# Altium PCB PCB1.PcbDoc
Units mm, origin at the board's own origin, x right, y up, seen from the top; angles counter-clockwise.
Board outline 133.2 x 122.7 mm, 2 copper layers (Top Layer, Bottom Layer); 87 components, 41 nets, 227 pads, 11 vias.
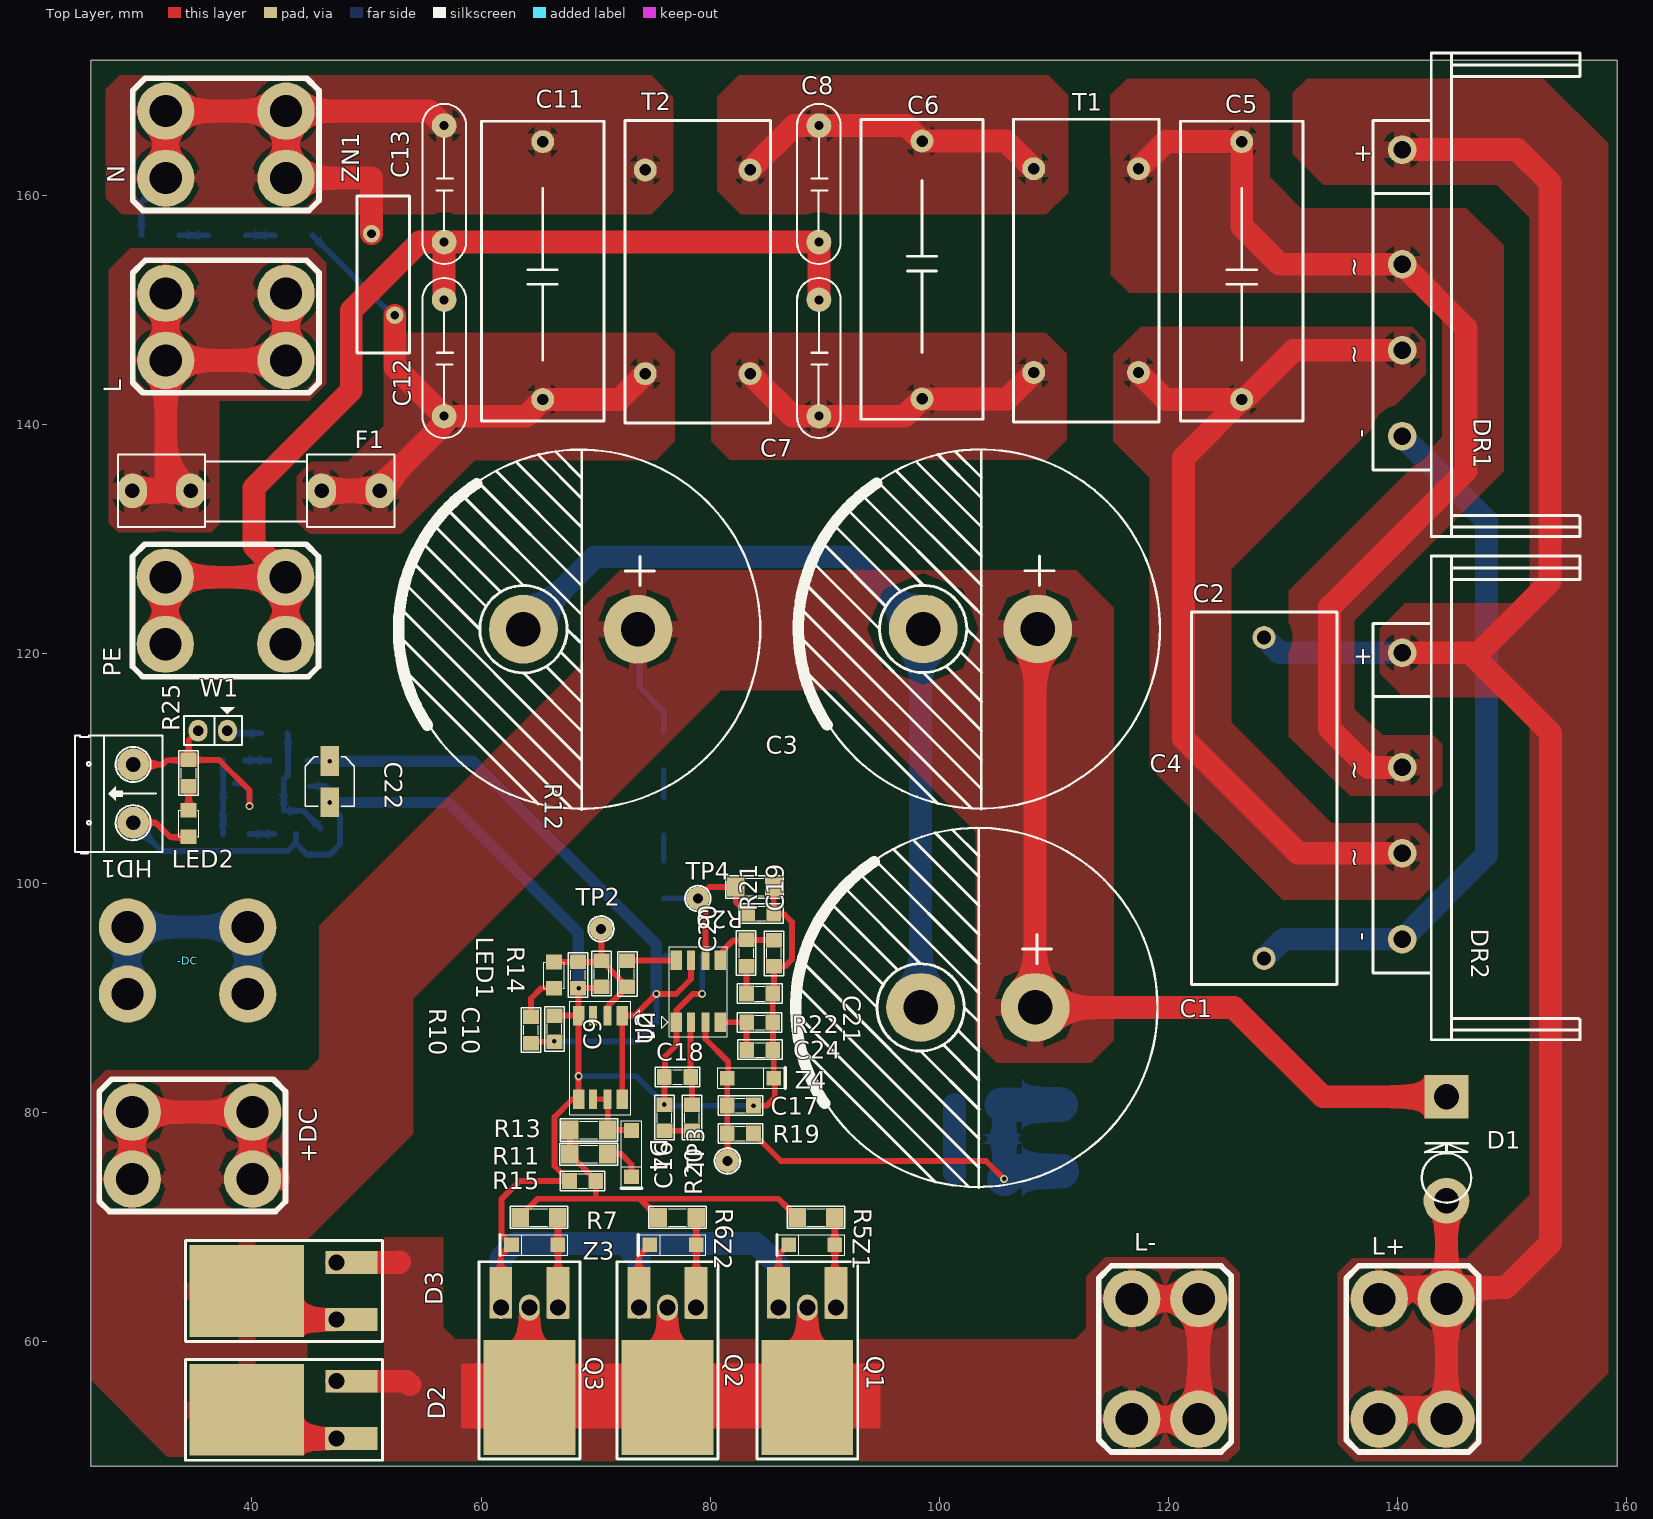
[diagram p0: Top Layer view]
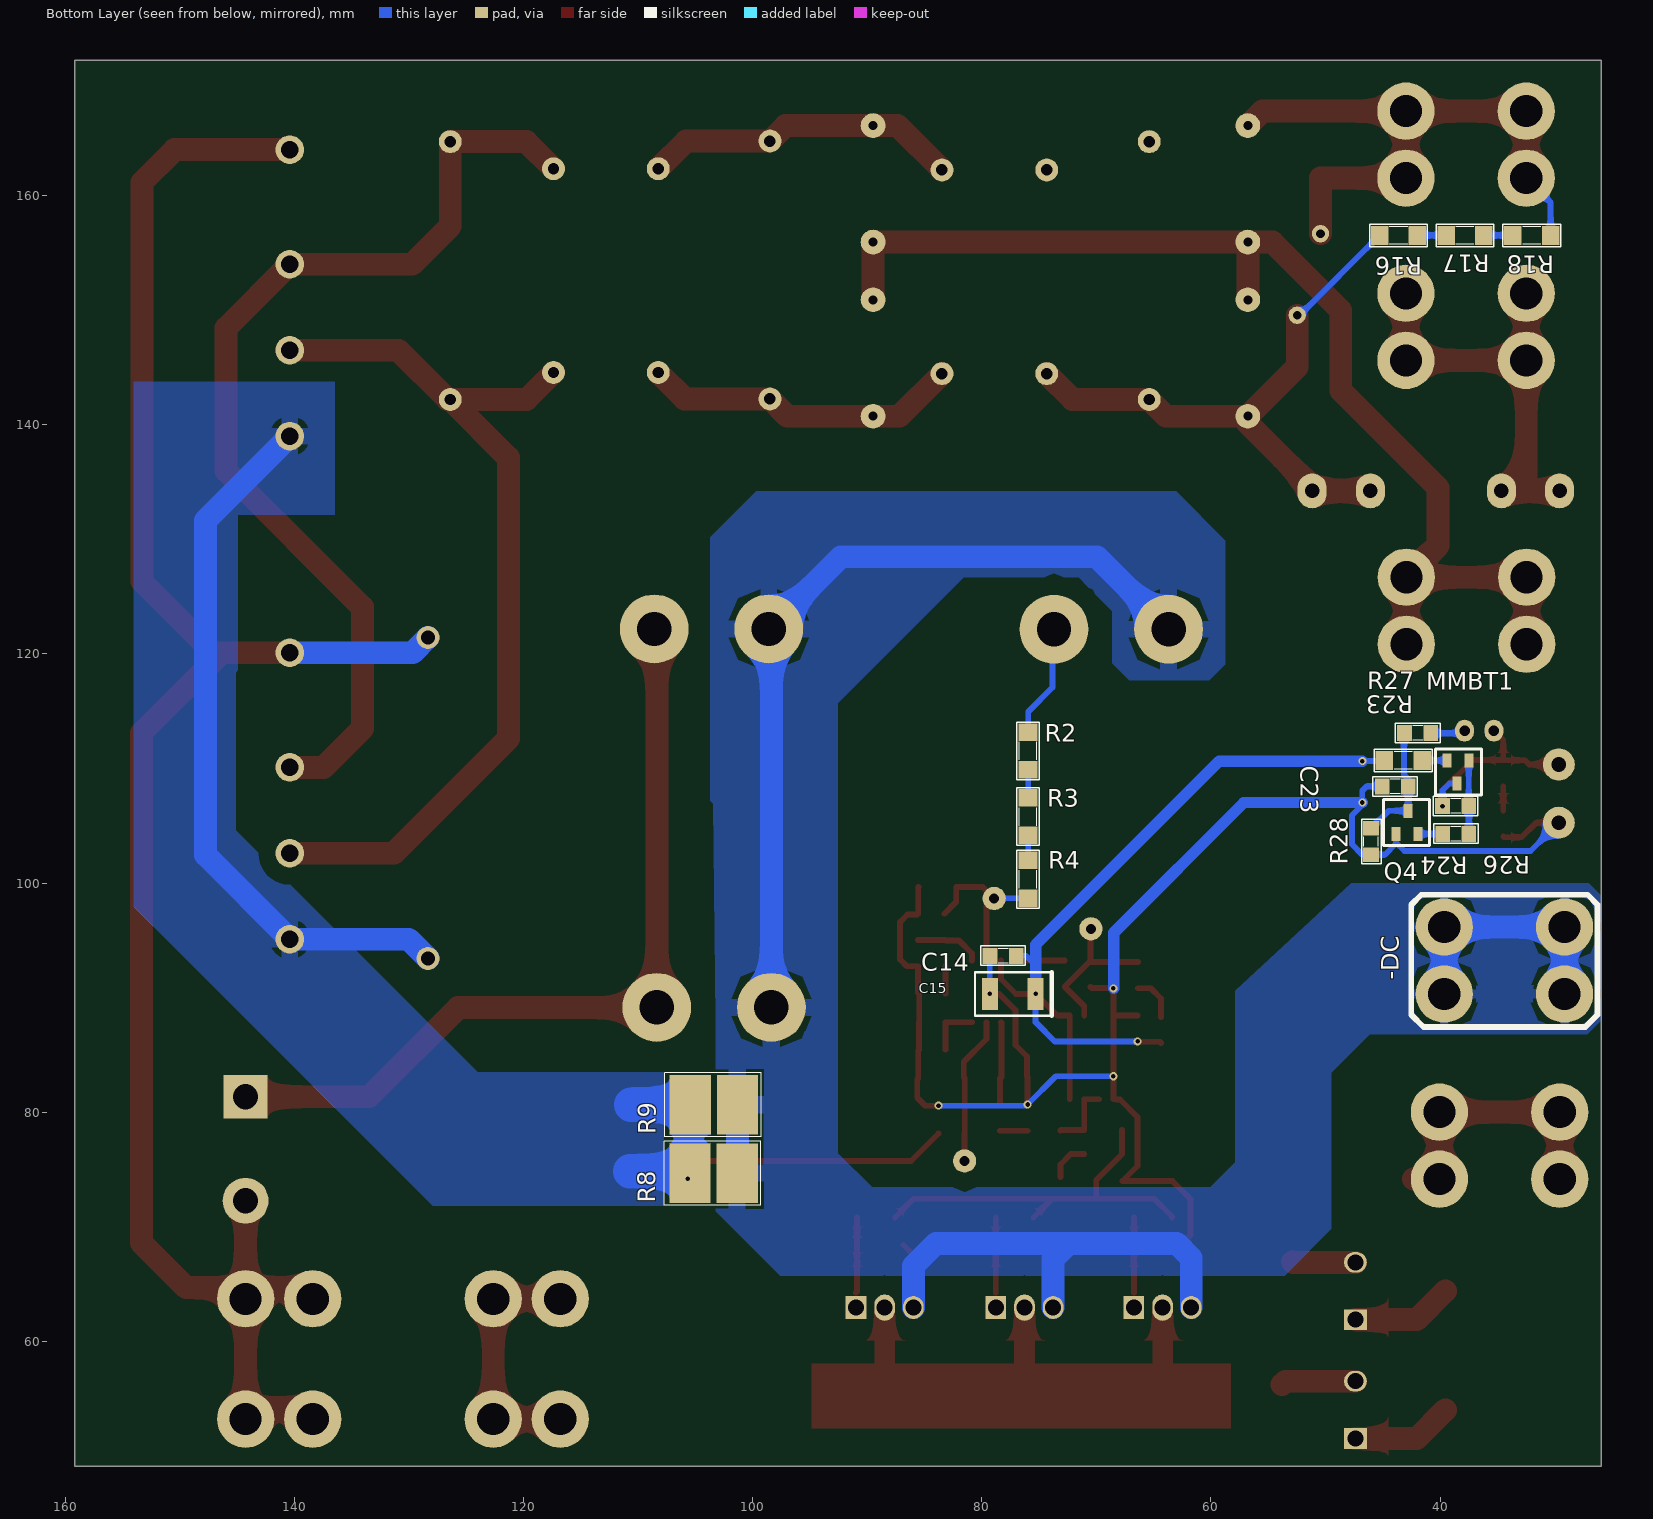
[diagram p1: Bottom Layer view, seen from below]
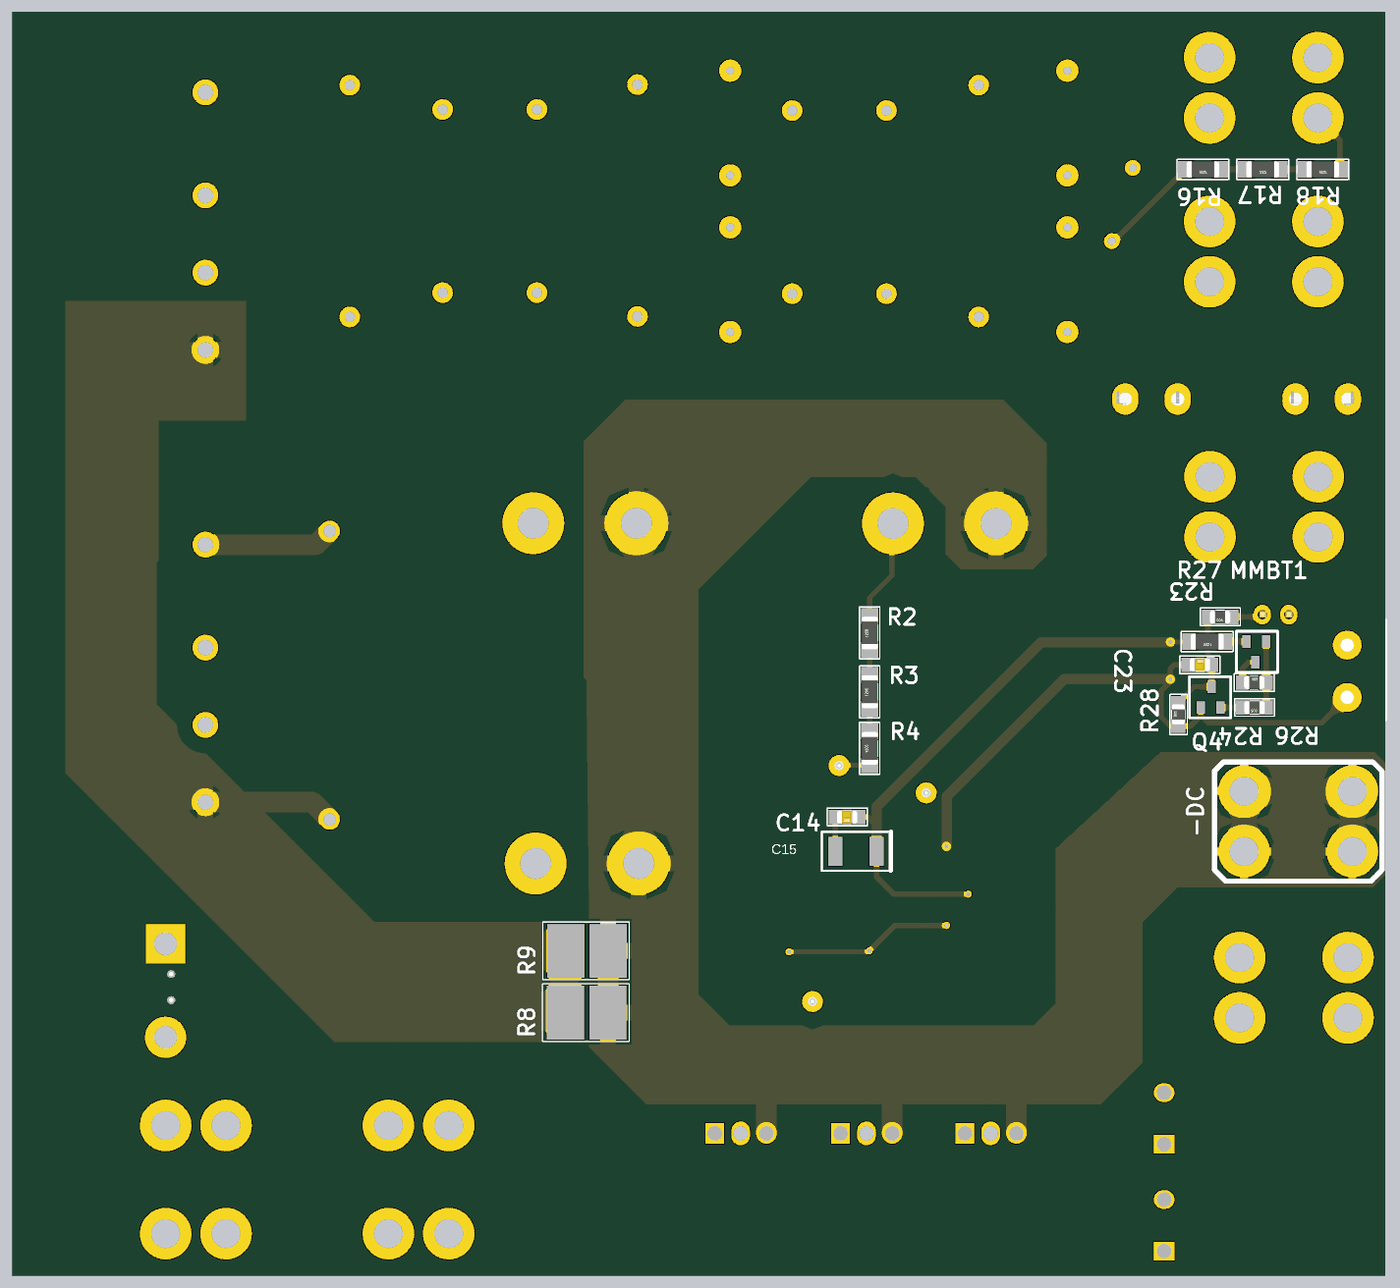
[diagram p2: 3D render of the assembled board from below, using the file's embedded part models]

## Layer stack, top to bottom
Top Solder: solder mask 0.0102, Solder Resist, Dk 3.5
Top Layer: signal copper 0.0356
Dielectric 1: dielectric 0.32, FR-4, Dk 4.8
Bottom Layer: signal copper 0.0356
Bottom Solder: solder mask 0.0102, Solder Resist, Dk 3.5

## Board outline
25.935,49.125 159.135,49.125 159.135,171.82 25.935,171.82

## Design rules (kind name [scope] priority, off if disabled: settings)
Clearance [All] p1: gap=0.2 except(0.5: Fill-Poly; 1.5: THPad-Poly)
PlaneClearance PlaneClearance_1 [All] p1: clearance=0.508
PlaneClearance "PlaneClearance Power" [(InNet('Net+DC_0') AND IsPolygon)] p2: clearance=3
PlaneConnect [All] p1: planeconnectstyle=Relief reliefexpansion=2 reliefentries=4 reliefconductorwidth=1.5 reliefairgap=1
PolygonConnect [All] p1: connectstyle=Relief reliefconductorwidth=1.5 reliefentries=4 polygonreliefangle="90 Angle" airgapwidth=0.5
RoutingVias [All] p1: holewidth=0.711 width=1.27 viastyle="Through Hole" minholewidth=0.711 minwidth=1.27 maxholewidth=0.711 maxwidth=1.27
SolderMaskExpansion [All] p1: expansion=0.1
Width [All] p1: maxlimit=5 minlimit=0.508 preferedwidth=0.508
28 further rules are at their usual default settings.

## Classes and differential pairs
component class Sheet3: C14 C15 C16 C17 C18 C19 C20 C21 C22 C23 C24 C27 C28 C29 C30 C32 C33 C34 C35 HD1 LED2 MMBT1 Q4 R19 R20 R21 R22 R23 R24 R25 R26 R27 R28 R29 TP3 TP4 TP? U2 U3 W1 Z4
component class Sheet1: +DC -DC C1 C2 C4 C5 C6 C7 C8 C9 C10 C11 C12 C13 D1 D2 D3 D4 DR1 DR2 F1 L L+ L- LED1 N PE Q1 Q2 Q3 R2 R3 R4 R5 R6 R7 R8 R9 R10 R11 R12 R13 R14 R15 R16 R17 R18 T1 T2 TP2 U1 Z1 Z2 Z3 ZN1

## Components (designator, comment, footprint, x,y, rotation, side; value= is the part's Value field where it differs from the comment)
+DC "ERNI" Connector#1 35,77.02 r90 top
-DC "ERNI" Connector#2 34.575,93.3 r270 top
C1 "330uF/450V" CAPACITOR 98.36,89.145 r0 top
C2 "PP105/630V" "C1UF 28MM" 128.335,93.42 r90 top
C3 "330uF/450V" CAPACITOR 63.7,122.15 r0 top
C4 "330uF/450V" CAPACITOR 98.585,122.17 r0 top
C5 "1uF 275Vac" "CAP 11X22" 126.385,164.695 r270 top
C6 "1uF275Vac" "CAP 11X22" 98.485,142.245 r90 top
C7 "1.5nF 250Vac" CN4 89.485,150.895 r270 top
C8 "1.5nF 250Vac" CN4 89.485,166.095 r270 top
C9 "1nF" SM-CAP-0805 70.505,93.22 r270 top
C10 "10uF" SM-CAP-0805 66.405,86.145 r90 top
C11 "1uF275Vac" "CAP 11X22" 65.385,164.695 r270 top
C12 "1.5nF 250Vac" CN4 56.785,150.895 r270 top
C13 "1.5nF 250Vac" CN4 56.785,166.095 r270 top
C14 "0.1uF" SM-CAP-0805 77,93.65 r0 bottom
C15 "1uF" "CAP 3228" 75.3,90.325 r0 bottom
C16 "470pF" SM-CAP-0805 76.005,80.67 r270 top
C17 "470pF" SM-CAP-0805 83.78,80.57 r180 top
C18 "470pF" SM-CAP-0805 76.005,83.07 r0 top
C19 "470pF" SM-CAP-0805 85.555,92.738 r90 top
C20 "470pF" SM-CAP-0805 85.55,97.325 r180 top
C21 "470pF" SM-CAP-0805 85.455,90.338 r180 top
C22 "10uF50V" CAP-ALU-SMD-4.5x5x1.4 46.8,108.85 r270 top
C23 "0.47pF" SM-CAP-0805 45.07,108.438 r180 bottom
C24 "470pF" SM-CAP-0805 85.462,85.445 r180 top
D1 "Diode" D5AN 144.25,79.35 r270 top
D2 "CSD06060" "TO-263 DIODE" 47.4,54.025 r180 top
D3 "CSD06060" "TO-263 DIODE" 47.4,64.4 r180 top
D4 "1N5819HW" BZT52C15 73.131,74.345 r90 top
DR1 "D25XB60" D25XB60 140.385,169.895 r270 top
DR2 "D25XB60" D25XB60 140.385,125.995 r270 top
F1 "F20A" Fuse 40.375,134.225 r0 top
HD1 "12V Supply" HED2 29.645,105.263 r90 top
L "ERNI" Connector#1 37.922,148.47 r90 top
L+ "ERNI" Connector#1 141.375,58.65 r180 top
L- "ERNI" Connector#1 119.775,58.65 r180 top
LED1 "LED" SM-LED-0805-Blue 66.38,90.82 r90 top
LED2 "LED" SM-LED-0805-Green 34.495,106.338 r270 top
MMBT1 "PNP" SOT_23 39.395,110.688 r0 bottom
N "ERNI" Connector#1 37.922,164.37 r90 top
PE "ERNI" Connector#1 37.885,123.695 r90 top
Q1 "TPB60R125" "TO-263 MOSFET" 88.475,62.95 r270 top
Q2 "TPB60R125" "TO-263 MOSFET" 76.275,62.95 r270 top
Q3 "TPB60R125" "TO-263 MOSFET" 64.225,62.95 r270 top
Q4 "2N7002-7-F" SOT23 41.945,104.288 r180 bottom
R2 "400K (3216)" SM-RES-1206 75.95,109.874 r90 bottom
R3 "400K (3216)" SM-RES-1206 75.95,104.149 r90 bottom
R4 "400K (3216)" SM-RES-1206 75.95,98.674 r90 bottom
R5 "1F(3216)" SM-RES-1206 87.58,70.82 r0 top
R6 "1F(3216)" SM-RES-1206 75.48,70.82 r0 top
R7 "1F(3216)" SM-RES-1206 63.405,70.82 r0 top
R8 "0.01" WSHM2818 103.375,75.175 r0 bottom
R9 "0.05" WSHM2818 103.35,81.175 r0 bottom
R10 "3k" SM-RES-0805 64.355,88.32 r270 top
R11 "0" SM-RES-1206 71.056,76.345 r180 top
R12 "4k" SM-RES-0805 72.755,90.945 r90 top
R13 "1" SM-RES-1206 67.756,78.445 r0 top
R14 "10k" SM-RES-0805 68.48,93.12 r270 top
R15 "10k" SM-RES-0805 70.006,73.995 r180 top
R16 "300K(3216)" SM-RES-1206 41.985,156.52 r0 bottom
R17 "300K(3216)" SM-RES-1206 36.185,156.52 r0 bottom
R18 "300K(3216)" SM-RES-1206 30.36,156.52 r0 bottom
R19 "1k" SM-RES-0805 83.78,78.145 r180 top
R20 "1k" SM-RES-0805 78.405,80.67 r270 top
R21 "1k" SM-RES-0805 83.155,95.038 r270 top
R22 "1k" SM-RES-0805 83.187,87.845 r0 top
R23 "15.4" SM-RES-1206 41.57,110.688 r0 bottom
R24 "10k" SM-RES-0805 39.795,106.713 r180 bottom
R25 "3k" SM-RES-0805 34.495,110.738 r270 top
R26 "6.8k" SM-RES-0805 37.495,104.288 r0 bottom
R27 "10k" SM-RES-0805 40.825,113.075 r0 bottom
R28 "6.8k" SM-RES-0805 46.02,102.478 r90 bottom
R29 "10k" SM-RES-1206 82.225,99.65 r0 top
T1 "LF" "EMI TRANFORMER" 108.485,144.295 r90 top
T2 "LF" "EMI TRANFORMER" 74.585,144.195 r90 top
TP2 "TP" TP1 70.475,96 r180 top
TP3 "TP" TP1 81.505,75.745 r90 top
TP4 "TP" TP1 78.925,98.65 r90 top
U1 "TC4422" TC4422 72.322,88.431 r270 top
U2 "UCC28180" UCC28180 77.055,87.845 r90 top
W1 "Jumper" JP2 37.875,113.3 r180 top
Z1 "Zener" BZT52C15 86.83,68.42 r0 top
Z2 "BZT52C15" BZT52C15 74.73,68.42 r0 top
Z3 "BZT52C15" BZT52C15 62.655,68.42 r0 top
Z4 "BAT54" BZT52C15 85.555,82.97 r180 top
ZN1 "Z" "RT 7MM" 56.285,152.595 r90 top

## Footprints (in the part's own frame and the unit in brackets; to place one, negate y for a bottom-side part, rotate by r counter-clockwise, add the part's x,y. Pads: shape width x height; smd on the part's side, far side on the other; paste and mask are expansions set on the pad)
BZT52C15 [mm]
  rect 1.27x1.27 smd: 1(0.007,0) 2(4.057,0)
  silkscreen extent -1,-0.9 4.9,0.9
"C1UF 28MM" [mm]
  round 2 hole 1.2: 1(0,0) 2(28,0)
  silkscreen extent -2.29,-6.35 30.23,6.35
"CAP 11X22" [mm] "cap 11x22mm"
  round 2 hole 1: 1(0,0) 2(22.5,0)
  silkscreen extent -1.78,-5.33 24.38,5.33
"CAP 3228" [mm]
  rect 1.4x2.8 smd: 1(0,0) 2(4,0)
  silkscreen extent -1.4,-1.9 5.3,1.9
CAP-ALU-SMD-4.5x5x1.4 [mm]
  rect 2.6x1.6 smd: 1(-1.8,0) 2(1.8,0)
  silkscreen extent -2.15,-2.15 2.15,2.15, body extent -2.5,-2.15 2.5,2.15, height 5.45
CAPACITOR [mm]
  round 6 hole 3: 1(10,0) 2(0,0)
  silkscreen extent -10.9,-15.75 20.67,15.67
CN4 [mil] "Cap np W 0.4"
  round 85 hole 31: 1(0,0) 2(400,0)
  silkscreen extent -75,-75 475,75
Connector#1 [mm]
  round 5 hole 2.8: 0(-2.861,5.433) 0(-2.861,-5.067) 0(2.989,5.433) 0(2.989,-5.067)
  Multi-Layer pour cut-out: 5.708,-5.467 3.389,-5.467 3.389,-7.786 4.276,-7.61 5.029,-7.107 5.531,-6.355 5.708,-5.467
  Multi-Layer pour cut-out: 2.589,-7.801 2.589,-5.467 0.255,-5.467 0.433,-6.36 0.939,-7.117 1.696,-7.623 2.589,-7.801
  Multi-Layer pour cut-out: 0.24,-4.667 2.589,-4.667 2.589,-2.318 1.69,-2.497 0.928,-3.006 0.418,-3.768 0.24,-4.667
  Multi-Layer pour cut-out: 3.389,-2.325 3.389,-4.667 5.731,-4.667 5.553,-3.771 5.045,-3.011 4.285,-2.503 3.389,-2.325
  Multi-Layer pour cut-out: -0.142,-5.467 -2.461,-5.467 -2.461,-7.786 -1.574,-7.61 -0.821,-7.107 -0.319,-6.355 -0.142,-5.467
  Multi-Layer pour cut-out: -3.261,-7.801 -3.261,-5.467 -5.595,-5.467 -5.417,-6.36 -4.911,-7.117 -4.154,-7.623 -3.261,-7.801
  Multi-Layer pour cut-out: -5.61,-4.667 -3.261,-4.667 -3.261,-2.318 -4.16,-2.497 -4.922,-3.006 -5.432,-3.768 -5.61,-4.667
  Multi-Layer pour cut-out: -2.461,-2.325 -2.461,-4.667 -0.119,-4.667 -0.297,-3.771 -0.805,-3.011 -1.565,-2.503 -2.461,-2.325
  Multi-Layer pour cut-out: 5.708,5.033 3.389,5.033 3.389,2.714 4.276,2.89 5.029,3.393 5.531,4.145 5.708,5.033
  Multi-Layer pour cut-out: 2.589,2.699 2.589,5.033 0.255,5.033 0.433,4.14 0.939,3.383 1.696,2.877 2.589,2.699
  Multi-Layer pour cut-out: 0.24,5.833 2.589,5.833 2.589,8.182 1.69,8.003 0.928,7.494 0.418,6.732 0.24,5.833
  Multi-Layer pour cut-out: 3.389,8.175 3.389,5.833 5.731,5.833 5.553,6.729 5.045,7.489 4.285,7.997 3.389,8.175
  Multi-Layer pour cut-out: -2.461,8.175 -2.461,5.833 -0.119,5.833 -0.297,6.729 -0.805,7.489 -1.565,7.997 -2.461,8.175
  Multi-Layer pour cut-out: -5.61,5.833 -3.261,5.833 -3.261,8.182 -4.16,8.003 -4.922,7.494 -5.432,6.732 -5.61,5.833
  Multi-Layer pour cut-out: -3.261,2.699 -3.261,5.033 -5.595,5.033 -5.417,4.14 -4.911,3.383 -4.154,2.877 -3.261,2.699
  Multi-Layer pour cut-out: -0.142,5.033 -2.461,5.033 -2.461,2.714 -1.574,2.89 -0.821,3.393 -0.319,4.145 -0.142,5.033
  silkscreen extent -5.69,-7.94 5.86,8.31
Connector#2 [mm]
  round 5 hole 2.8: 0(-2.861,5.067) 0(-2.861,-5.433) 0(2.989,5.067) 0(2.989,-5.433)
  Multi-Layer pour cut-out: 5.708,5.467 3.389,5.467 3.389,7.786 4.276,7.61 5.029,7.107 5.531,6.355 5.708,5.467
  Multi-Layer pour cut-out: 2.589,7.801 2.589,5.467 0.255,5.467 0.433,6.36 0.939,7.117 1.696,7.623 2.589,7.801
  Multi-Layer pour cut-out: 0.24,4.667 2.589,4.667 2.589,2.318 1.69,2.497 0.928,3.006 0.418,3.768 0.24,4.667
  Multi-Layer pour cut-out: 3.389,2.325 3.389,4.667 5.731,4.667 5.553,3.771 5.045,3.011 4.285,2.503 3.389,2.325
  Multi-Layer pour cut-out: -0.142,5.467 -2.461,5.467 -2.461,7.786 -1.574,7.61 -0.821,7.107 -0.319,6.355 -0.142,5.467
  Multi-Layer pour cut-out: -3.261,7.801 -3.261,5.467 -5.595,5.467 -5.417,6.36 -4.911,7.117 -4.154,7.623 -3.261,7.801
  Multi-Layer pour cut-out: -5.61,4.667 -3.261,4.667 -3.261,2.318 -4.16,2.497 -4.922,3.006 -5.432,3.768 -5.61,4.667
  Multi-Layer pour cut-out: -2.461,2.325 -2.461,4.667 -0.119,4.667 -0.297,3.771 -0.805,3.011 -1.565,2.503 -2.461,2.325
  Multi-Layer pour cut-out: 5.708,-5.033 3.389,-5.033 3.389,-2.714 4.276,-2.89 5.029,-3.393 5.531,-4.145 5.708,-5.033
  Multi-Layer pour cut-out: 2.589,-2.699 2.589,-5.033 0.255,-5.033 0.433,-4.14 0.939,-3.383 1.696,-2.877 2.589,-2.699
  Multi-Layer pour cut-out: 0.24,-5.833 2.589,-5.833 2.589,-8.182 1.69,-8.003 0.928,-7.494 0.418,-6.732 0.24,-5.833
  Multi-Layer pour cut-out: 3.389,-8.175 3.389,-5.833 5.731,-5.833 5.553,-6.729 5.045,-7.489 4.285,-7.997 3.389,-8.175
  Multi-Layer pour cut-out: -2.461,-8.175 -2.461,-5.833 -0.119,-5.833 -0.297,-6.729 -0.805,-7.489 -1.565,-7.997 -2.461,-8.175
  Multi-Layer pour cut-out: -5.61,-5.833 -3.261,-5.833 -3.261,-8.182 -4.16,-8.003 -4.922,-7.494 -5.432,-6.732 -5.61,-5.833
  Multi-Layer pour cut-out: -3.261,-2.699 -3.261,-5.033 -5.595,-5.033 -5.417,-4.14 -4.911,-3.383 -4.154,-2.877 -3.261,-2.699
  Multi-Layer pour cut-out: -0.142,-5.033 -2.461,-5.033 -2.461,-2.714 -1.574,-2.89 -0.821,-3.393 -0.319,-4.145 -0.142,-5.033
D5AN [mm] "Diode 5A, W 200mil, L 250mil"
  round 4 hole 2.2: 1(7.08,0)
  rect 3.81x3.81 hole 2.2: 2(-2,0)
  silkscreen extent 2.06,-2.16 7.24,2.16, body extent 0.53,-1.88 4.8,0.79, height 6.41
D25XB60 [mm]
  round 2.5 hole 1.5: 1(5.9,0) 2(15.9,0) 3(23.4,0) 4(30.9,0)
  silkscreen extent -2.54,-2.54 39.67,15.5
"EMI TRANFORMER" [mm]
  round 2 hole 1: 1(0.254,0.254) 2(0.254,-8.89) 3(18.034,0.254) 4(18.034,-8.89)
  silkscreen extent -4.06,-10.67 22.35,2.03
Fuse [mil] "De Fuse"
  oval 100x120 hole 50: 1(-425,0) 1(-225,0) 2(225,0) 2(425,0)
  silkscreen extent -475,-125 475,125, body extent -448,-117 459,127, height 378
HED2 [mil] "Header 2, 2 pin, hight 300mil, Pin to Pin 200, Colour Green"
  round 110 hole 50: 1(0,0) 2(200,0)
  silkscreen extent -106,-100 300,200, body extent -92,-140 302,155, height 394
JP2 [mil]
  oval 65x75 hole 36: 1(0,0) 2(101,0)
  silkscreen extent -50,-81 150,50, body extent -48,-50 148,48, height 323
"RT 7MM" [mil]
  round 60 hole 30: 1(-120,150) 2(160,230)
  silkscreen extent -250,100 290,280
SM-CAP-0805 [mil]
  rect 50x55 smd: 1(0,0) 2(90,0)
  silkscreen extent -32,-34 121,33, body extent 6,-25 84,25, height 31
SM-LED-0805-Blue [mil]
  rect 50x55 smd: 1(0,0) 2(90,0)
  silkscreen extent 0,-35 90,35, body extent 5,-25 85,25, height 43
SM-LED-0805-Green [mil]
  rect 50x55 smd: 1(0,0) 2(90,0)
  silkscreen extent 0,-35 90,35, body extent 5,-25 85,25, height 43
SM-RES-0805 [mil]
  rect 50x55 smd: 1(0,0) 2(90,0)
  silkscreen extent -32,-34 121,33, body extent 6,-25 84,25, height 31
SM-RES-1206 [mil]
  rect 60x65 smd: 1(0,0) 2(130,0)
  silkscreen extent -34,-38 164,39, body extent 2,-31 128,31, height 40
SOT23 [mm]
  rect 0.8x1.2 smd: 1(-1.9,0) 2(-0.85,2) 3(0,0)
  silkscreen extent -3,-1 1,3
SOT_23 [mm]
  rect 0.8x1.2 smd: 1(-1.9,0) 2(-0.85,2) 3(0,0)
  silkscreen extent -3,-1 1,3
TC4422 [mm]
  rect 1.7x1 smd: 1(0,0) 4(0,-3.81) 5(7.3,-3.81) 8(7.3,0)
  rect 1.7x0.7 smd: 2(0,-1.27) 3(0,-2.54) 6(7.3,-2.54) 7(7.3,-1.27)
  silkscreen extent -1.27,-4.57 8.64,1.52
"TO-263 DIODE" [mm]
  rect 4.5x2 smd: 1(-1.3,2.5) 2(-1.3,-2.5)
  rect 2x1.8 hole 1.4: 1(0,2.5)
  rect 10x8 smd: 1(7.85,0)
  oval 2x1.8 hole 1.4: 2(0,-2.5)
  silkscreen extent -4,-4.4 13.2,4.4
"TO-263 MOSFET" [mm]
  rect 4.5x2 smd: 1(-1.3,2.5) 3(-1.3,-2.5)
  rect 2x1.8 hole 1.4: 1(0,2.5)
  oval 2.3x1.8 hole 1.4: 2(0,0)
  rect 10x8 smd: 2(7.85,0)
  oval 2x1.8 hole 1.4: 3(0,-2.5)
  Top Layer lines w1.8: 7.2,0 0,0
  Top Layer lines w2: 7.3,-0.1 7.2,0
  silkscreen extent -4,-4.4 13.2,4.4
TP1 [mil] "Test point"
  round 80 hole 35: 1(0,0)
  silkscreen extent -44,-44 44,44, body extent -50,-50 50,50, height 178
UCC28180 [mm]
  rect 1.7x1 smd: 1(0,0) 4(0,-3.81) 5(5.4,-3.81) 8(5.4,0)
  rect 1.7x0.7 smd: 2(0,-1.27) 3(0,-2.54) 6(5.4,-2.54) 7(5.4,-1.27)
  silkscreen extent -1.27,-4.44 6.6,1.27
WSHM2818 [mm]
  rect 3.6x5.2 smd: 1(-2.027,0.508) 2(2.083,0.508)
  silkscreen extent -4.09,-2.29 4.32,3.3

## Part data
+DC -DC L L+ L- N PE: library part Connector
C1 C3 C4 C22: library part CP9, "Cap 10000uF/63V"
C2 C5 C6 C7 C8 C9 C10 C11 C12 C13 C14 C15 C16 C17 C18 C19 C20 C21 C23 C24: library part "Cap Semi_3", "Capacitor (Semiconductor SIM Model)"
D1: "Default Diode"
D4: library part D0.5A, "D0.5A"
DR1 DR2: library part "Bridge Rectifier"
F1: library part Fuse, "Fuse"
HD1: library part Hed2, "Header 2 (Green)"
LED1 LED2: "LED Single colour Green and Red"
MMBT1: "PNP Bipolar Transistor"
Q1 Q2 Q3 Q4: library part IRF840, "MOSFET N - CHANNEL 500V - 0.75 - 8A - TO-220"
R2 R3 R4 R5 R6 R7 R8 R9 R10 R11 R12 R13 R14 R15 R16 R17 R18 R19 R20 R21 R22 R23 R24 R25 R26 R27 R28 R29: library part R, "Resistor 1/4W"
T1 T2: library part "IEMI filter"
TP2 TP3 TP4: library part TP1, "Test Point"
U1: library part DIP8, "DIP8"
W1: "Jumper Wire"
Z2 Z3 Z4: library part Zener
ZN1: library part ZN, "Zenner Protect AC in"

## Via types
v1: diameter 0.7, hole 0.4, Top Layer to Bottom Layer, 11 vias

## Nets (pads, with @x,y where several pads share a name; then routed paths per layer and width w, separated by ;. In a path a pad name is that pad's centre, name@x,y a point inside that pad or via, vN(x,y) a via of type N, cw(c..) or ccw(c..) an arc to the next point about the centre after c; other vN are vias at no path point)
+12V: C10.1 C14.1 C15.1 C22.1 R10.2 R23.2 U1.1 U1.8 U2.7 | length 73.8
  Top Layer w0.508: R10.2 64.466,86.145 C10.1 ; U1.8 U1.1 73.406,88.431 v1(75.3,90.325) 77.025,90.325 78.325,91.625 U2.7
  Bottom Layer w0.508: R23.2 44.922,110.638 v1(46.785,110.638) ; v1(66.4,86.175) 73.625,86.175 75.3,87.85 v1(75.3,90.325) ; 75.3,92.8 76.15,93.65 C14.1
  Bottom Layer w1: v1(46.785,110.638) 59.287,110.638 75.3,94.625 75.3,92.8 v1(75.3,90.325)
AGND: -DC.0 C1.2 C3.2 C4.2 C9.2 C10.2 C14.2 C15.2 C16.1 C17.1 C18.1 C19.1 C20.1 C21.1 C22.2 C23.1 C24.1 HD1.1 LED2.2 Q1.3 Q2.3 Q3.3 Q4.1 R8.1 R9.1 R14.2 R15.2 R22.2 R28.1 R29.2 U1.4 U1.5 U2.1 Z1.1 Z2.1 Z3.1 Z4.1 | length 308.2
  Top Layer w0.508: HD1.1 31.62,105.263 32.895,103.988 34.431,103.988 LED2.2 ; Q3.3@61.725,64.25 61.725,67.483 Z3.1 61.775,69.307 61.775,72.4 63.37,73.995 R15.2 66.405,75.31 66.405,79.57 67.935,81.1 68.225,81.1 68.256,81.131 U1.5 v1(68.512,83.138) U1.4 ; C10.2 U1.4 ; C9.2 70.405,90.834 R14.2 v1(68.512,90.802) U1.4 ; Q2.3@73.775,64.25 73.775,67.458 Z2.1 ; v1(76.005,80.67) C18.1 76.055,83.12 76.055,84.87 77.055,85.87 U2.1 77.055,88.905 78.475,90.325 v1(79.3,90.325) ; v1(83.78,80.57) 84.93,80.57 85.63,81.27 85.63,82.888 Z4.1 C24.1@85.548,85.359 ; C24.1@85.473,85.456 R22.2 85.455,87.863 C21.1 85.555,90.438 C19.1 86.538,92.738 87.125,93.325 87.125,96.6 86.475,97.25 85.625,97.25 C20.1 85.55,99.627 R29.2 ; Q1.3@85.975,64.25 85.975,67.558 Z1.1
  Bottom Layer w0.508: HD1.1 32.12,102.788 43.12,102.788 43.845,103.513 Q4.1 43.845,103.453 44.82,102.478 R28.1 46.795,102.478 47.695,103.378 47.695,105.905 46.795,106.805 v1(46.795,107.028) 46.795,108.055 46.412,108.438 C23.1 ; v1(68.512,83.138) 73.537,83.138 v1(76.005,80.67) 76.105,80.57 v1(83.78,80.57) ; C14.2 79.3,93.636 v1(79.3,90.325)
  Bottom Layer w1: v1(46.795,107.028) 57.122,107.028 68.48,95.67 v1@68.48,90.834
  Bottom Layer w2: -DC.0@29.142,90.311 29.142,96.161 39.642,96.161 -DC.0@39.642,90.311 ; Q3.3@61.725,62.95 61.725,67.275 63,68.55 84,68.55 85.975,66.575 Q1.3@85.975,62.95 ; C3.2@63.085,122.22 63.71,122.22 69.96,128.47 92.285,128.47 C4.2 98.36,121.945 C1.2 ; 72.6,68.375 73.775,67.2 Q2.3@73.775,62.95 ; R9.1 101.323,74.692 R8.1
Net+DC_0: +DC.0 C1.1 C3.1 C4.1 D1.2 D2.1 D3.1 R2.2 | length 124.7
  Top Layer w2: +DC.0@29.567,74.159 29.567,80.009 40.067,80.009 40.067,74.159 +DC.0@42.341,74.159 ; D2.1@39.55,54.025 42.05,51.525 D2.1@47.4,51.525 ; D3.1@39.55,64.4 42.05,61.9 D3.1@47.4,61.9 ; C4.1 108.36,121.945 C1.1 108.38,89.125 125.7,89.125 133.475,81.35 D1.2
  Bottom Layer w0.508: C3.1 73.825,122.025 73.825,117.075 75.95,114.95 R2.2
  Bottom Layer w2: C4.1@108.36,121.945 C4.1
NetC2_1: C2.1 DR1.4 DR2.4 R8.2 R9.2 R19.1 | length 103.3
  Top Layer w0.508: R19.1 86.175,75.75 104.075,75.75 v1(105.65,74.175)
  Bottom Layer w0.508: R9.2 R9.2@105.65,80.45
  Bottom Layer w2: v1(105.65,74.175) R9.2@105.65,80.45 ; C2.1 130.01,95.095 DR2.4 147.735,102.445 147.735,131.645 DR1.4
  Bottom Layer w3: R9.2 110.608,80.667 ; v1(105.65,74.175) 106.325,74.85 110.7,74.85
NetC2_2: C2.2 D1.1 DR1.1 DR2.1 L+.0 | length 177.8
  Top Layer w2: L+.0@138.386,54.192 144.236,54.192 L+.0@144.236,64.692 ; L+.0@138.386,64.692 L+.0@144.236,64.692 ; DR1.1 150.435,163.995 153.285,161.145 153.285,126.295 147.085,120.095 140.385,120.095 146.335,120.095 153.335,113.095 153.335,68.61 149.417,64.692 L+.0@144.236,64.692 ; D1.1 144.25,64.706 L+.0@144.236,64.692
  Bottom Layer w2: C2.2 129.66,120.095 DR2.1@140.385,120.095
NetC5_1: C5.1 DR1.2 DR2.2 T1.4 | length 88.2
  Top Layer w2: T1.4 119.741,164.695 C5.1 126.385,157.32 129.71,153.995 DR1.2 145.96,148.42 145.96,135.97 134.06,124.07 134.06,113.47 137.435,110.095 DR2.2
NetC5_2: C5.2 DR1.3 DR2.3 T1.2 | length 80.7
  Top Layer w2: T1.2 119.729,142.195 C5.2 ; DR2.3 131.31,102.595 121.31,112.595 121.31,137.12 C5.2 ; DR1.3 130.91,146.495 126.61,142.195 C5.2
NetC6_1: C6.1 C7.2 T1.1 T2.2 | length 27.9
  Top Layer w2: T2.2 87.189,140.735 C7.2 96.975,140.735 C6.1 105.927,142.245 T1.1
NetC6_2: C6.2 C8.1 T1.3 T2.4 | length 27.9
  Top Layer w2: T2.4 87.341,166.095 C8.1 97.135,166.095 C6.2 105.815,164.745 T1.3
NetC7_1: C7.1 C8.2 C12.1 C13.2 PE.0 | length 103.5
  Top Layer w2: PE.0@32.452,120.834 32.452,126.684 PE.0@42.952,126.684 ; PE.0@42.952,120.834 PE.0@42.952,126.684 ; C12.1 C13.2 ; C7.1 C8.2 C13.2 ; PE.0@42.952,126.684 40.175,129.461 40.175,134.475 48.675,142.975 48.675,149.96 54.65,155.935 C13.2
NetC9_1: C9.1 LED1.2 R12.1 R14.1 TP2.1 U1.2 | length 13.5
  Top Layer w0.508: LED1.2 68.466,93.106 R14.1 70.405,93.12 C9.1 ; TP2.1@70.325,96 70.505,95.82 C9.1 ; U1.2 71.052,89.242 R12.1 72.755,90.97 C9.1
NetC11_1: C11.1 C13.1 N.0 R18.1 T2.3 ZN1.2 | length 54.7
  Top Layer w2: N.0@32.489,161.509 32.489,167.359 N.0@42.989,167.359 ; ZN1.2 50.443,161.509 42.989,161.509 N.0@42.989,167.359 ; C13.1 55.521,167.359 N.0@42.989,167.359
  Bottom Layer w0.508: R18.1 30.36,159.38 N.0@32.489,161.509
NetC11_2: C11.2 C12.2 F1.2 R16.2 T2.1 ZN1.1 | length 53.8
  Top Layer w2: F1.2@46.075,134.22 51.155,134.22 51.155,134.48 56.925,140.25 56.925,140.595 C12.2 ; ZN1.1 52.475,145.045 C12.2 ; T2.1 72.077,142.195 C11.2 63.925,140.735 C12.2
  Bottom Layer w0.508: R16.2 52.26,149.547 ZN1.1
NetC16_2: C16.2 R20.2 | length 2.4
  Top Layer w0.508: C16.2 R20.2
NetC17_2: C17.2 R19.2 TP3.1 U2.3 Z4.2 | length 13
  Top Layer w0.508: U2.3 79.595,86.38 81.58,84.395 81.58,83.052 Z4.2 81.494,82.966 C17.2 R19.2 81.505,78.134 TP3.1
NetC18_2: C18.2 R20.1 U2.2 | length 7.2
  Top Layer w0.508: U2.2 78.291,87.811 C18.2 78.405,82.956 R20.1
NetC19_2: C19.2 R21.1 U2.5 | length 5.8
  Top Layer w0.508: U2.5 80.865,93.84 82.02,94.995 83.112,94.995 R21.1 85.541,95.038 C19.2
NetC20_2: C20.2 R4.1 R29.1 TP4.1 U2.6 | length 15.2
  Top Layer w0.508: U2.6 79.595,97.98 TP4.1 79.925,99.65 R29.1 82.225,98.364 C20.2
  Bottom Layer w0.508: R4.1 78.901,98.674 TP4.1 TP4.1@78.9,98.625
NetC21_2: C21.2 R21.2 | length 2.4
  Top Layer w0.508: R21.2 83.155,90.352 C21.2
NetC23_2: C23.2 Q4.2 R27.2 R28.2 | length 10.8
  Bottom Layer w0.508: R27.2 43.156,113.03 43.156,109.424 42.784,109.051 C23.2 42.784,106.299 44.485,106.299 R28.2
NetC24_2: C24.2 R22.1 U2.4 | length 4.7
  Top Layer w0.508: U2.4 R22.1 ; C24.2 R22.1@83.176,87.834
NetD2_2: D2.2 D3.2 L-.0 Q1.2 Q2.2 Q3.2 | length 35.9
  Top Layer w2: D2.2@47.4,56.525 48.7,56.525 53.5,56.525 53.8,56.225 ; D3.2@47.4,66.9 48.7,66.9 52.825,66.9 52.875,66.95 ; Q2.2@76.275,55.75 Q2.2@76.925,55.1 ; L-.0@116.786,53.217 122.636,53.217 122.636,63.717 L-.0@116.786,63.717
  Top Layer w5: Q3.2@64.125,55.65 Q3.2@64.675,55.1
NetD4_1: D4.1 R11.1 | length 3.5
  Top Layer w0.508: R11.1 72.23,76.345 73.131,75.444 D4.1
NetD4_2: D4.2 R13.2 U1.6 U1.7 | length 6
  Top Layer w0.508: U1.6 U1.7 71.058,81.125 R13.2 73.088,78.445 D4.2
NetF1_1: F1.1 L.0 | length 41.4
  Top Layer w2: F1.1@29.565,134.22 34.645,134.22 32.489,136.376 ; 32.489,134.551 L.0@32.489,145.609 ; L.0@32.489,151.459 L.0@32.489,145.609 ; L.0@42.989,151.459 42.989,145.609 L.0@32.489,145.609
NetHD1_2: HD1.2 MMBT1.2 R24.1 R25.1 W1.2 | length 18.6
  Top Layer w0.508: HD1.2 32.225,110.343 32.595,110.713 34.47,110.713 R25.1 ; W1.2 34.495,112.485 R25.1 ; v1(39.795,106.713) 39.795,108.087 37.145,110.738 R25.1
  Bottom Layer w0.508: MMBT1.2 39.195,108.688 39.795,108.087 v1(39.795,106.713)
NetLED1_1: LED1.1 R10.1 | length 4
  Top Layer w0.508: R10.1 64.355,89.92 65.255,90.82 LED1.1
NetLED2_1: LED2.1 R25.2 | length 2.1
  Top Layer w0.508: LED2.1 R25.2
NetMMBT1_1: MMBT1.1 R24.2 R26.1 | length 6.4
  Bottom Layer w0.508: R26.1 37.495,106.698 R24.2 37.509,110.673 MMBT1.1
NetMMBT1_3: MMBT1.3 R23.1 | length 2.2
  Bottom Layer w0.508: MMBT1.3 R23.1
NetQ1_1: Q1.1 R5.2 Z1.2 | length 6.6
  Top Layer w0.508: R5.2 90.882,68.425 Z1.2 ; Z1.2@90.905,68.402 Z1.2 ; Q1.1@90.975,64.25 90.887,64.338 Z1.2
NetQ2_1: Q2.1 R6.2 Z2.2 | length 6.6
  Top Layer w0.508: Q2.1@78.775,64.25 78.787,64.262 Z2.2 78.782,68.425 R6.2
NetQ3_1: Q3.1 R7.2 Z3.2 | length 6.6
  Top Layer w0.508: R7.2 66.712,70.815 Z3.2 66.725,68.407 Q3.1@66.725,64.25
NetQ4_3: Q4.3 R26.2 | length 2.2
  Bottom Layer w0.508: R26.2 Q4.3
NetR2_1: R2.1 R3.2 | length 2.4
  Bottom Layer w0.508: R3.2 R2.1
NetR3_1: R3.1 R4.2 | length 2.2
  Bottom Layer w0.508: R4.2 R3.1
NetR5_1: R5.1 R6.1 R7.1 R11.2 R13.1 R15.1 | length 34.8
  Top Layer w0.508: R7.1 R7.1 63.405,70.894 64.956,72.445 70,72.445 ; R13.1 67.754,78.443 R11.2 70.006,74.093 R15.1 70.006,72.451 70,72.445 ; R6.1 73.855,72.445 ; R5.1 85.955,72.445 73.855,72.445 ; 70,72.445 73.855,72.445
NetR12_2: R12.2 U2.8 | length 4.3
  Top Layer w0.508: R12.2 77.041,93.231 U2.8
NetR16_1: R16.1 R17.2 | length 2.5
  Bottom Layer w0.508: R17.2 R16.1
NetR17_1: R17.1 R18.2 | length 2.5
  Bottom Layer w0.508: R18.2 R17.1
NetR27_1: R27.1 W1.1 | length 3
  Bottom Layer w0.508: W1.1 38.1,113.075 R27.1
pads on no net: U1.3

## Polygon pours and split planes (outlines as drawn)
Net+DC_0 on Top Layer "Top Layer-No Net" (solid, pour order 50): 105.025,102.625 105.025,127.3 72.15,127.3 69.015,124.165 69.015,116.8 90.85,116.8
Net+DC_0 on Top Layer "Top Layer-No Net" (solid, pour order 52): 69.3,119.675 45.9,96.275 45.9,84.7 44.825,83.625 44.825,68.875 54.085,78.135 54.085,89.91 83.85,119.675
Net+DC_0 on Top Layer "Top Layer-No Net" (solid, pour order 48): 115.21,86.26 113.27,84.32 105.005,84.32 103.185,86.14 103.185,125.96 104.525,127.3 111.95,127.3 115.21,124.04
NetD2_2 on Top Layer "Top Layer-No Net" (solid, pour order 72): 126.2,65.975 124.85,67.325 114.475,67.325 112.825,65.675 112.825,61.15 111.85,60.175 57.775,60.175 56.7,61.25 56.7,69.1 51.575,69.1 51.575,49.525 125.175,49.525 126.2,50.55
Net+DC_0 on Top Layer "Top Layer-No Net" (solid, pour order 54): 44.835,49.95 32.625,49.95 25.935,56.64 25.935,82.36 27.245,83.67 44.835,83.67
NetC11_1 on Top Layer "Top Layer-No Net" (solid, pour order 12): 29.335,170.47 28.47,170.47 27.25,169.25 27.25,160.455 27.25,159.75 28.63,158.37 74.845,158.37 76.785,160.31 76.785,168.54 74.855,170.47
NetC6_2 on Top Layer "Top Layer-No Net" (solid, pour order 14): 82.494,170.494 80.61,168.61 80.61,160.39 82.655,158.345 109.345,158.345 111.235,160.235 111.235,168.765 109.506,170.494
NetC5_1 on Top Layer "Top Layer-No Net" (solid, pour order 16): 114.927,168.727 114.947,158.358 114.957,153.093 116.547,151.503 143.873,151.45 143.873,138.923 130.475,125.525 130.475,112.755 135.851,107.625 142.975,107.625 143.873,108.523 143.873,110.027 143.873,112.127 143.092,112.908 138.67,112.908 136.197,115.17 136.197,122.897 149.235,135.935 149.235,155.64 145.98,158.895 131.555,158.895 128.835,161.615 128.835,168.965 127.605,170.195 116.395,170.195
NetF1_1 on Top Layer "Top Layer-No Net" (solid, pour order 18): 27.525,153.534 29.391,155.4 45.23,155.4 46.5,154.13 46.5,143.575 45.025,142.1 37.16,142.1 37.16,131.31 36.45,130.6 28.325,130.6 27.525,131.4
NetC11_2 on Top Layer "Top Layer-No Net" (solid, pour order 20): 51.5,148.019 51.5,139.9 48.35,136.75 45.192,136.75 43.9,135.498 43.9,131.495 45.004,130.475 53.025,130.475 59.45,136.9 75.276,136.9 76.926,138.55 76.926,146.349 75.256,148.019
NetC6_1 on Top Layer "Top Layer-No Net" (solid, pour order 22): 81.805,148.02 80.11,146.325 80.11,138.565 81.725,136.95 109.35,136.95 111.1,138.7 111.1,146.2 109.28,148.02
NetC2_2 on Top Layer "Top Layer-No Net" (solid, pour order 24): 132.093,170.193 152.707,170.193 158.36,164.54 158.36,57.235 150.675,49.55 136.275,49.55 134.775,51.05 134.775,66 136.025,67.25 145.975,67.25 151.5,72.775 151.5,158.075 148.655,160.92 139.785,160.92 133.505,160.92 130.85,163.575 130.85,168.95
NetC2_2 on Top Layer "Top Layer-No Net" (solid, pour order 26): 156.45,124.4 140.64,124.4 138.435,122.195 138.435,118.295 140.505,116.225 156.45,116.225
NetC5_2 on Top Layer "Top Layer-No Net" (solid, pour order 28): 117.56,148.535 115.185,146.16 115.185,138.54 118.36,135.365 118.36,110.115 129.95,98.525 141.85,98.525 142.96,99.635 142.96,104.015 141.755,105.22 134.26,105.22 125.45,114.03 125.45,127.385 141.435,143.37 142.46,144.395 142.46,147.32 141.245,148.535
AGND on Bottom Layer "Top Layer-No Net" (solid, pour order 64): 55.925,65.75 55.925,77.6 60.075,73.45 89.575,73.45 92.55,76.425 92.55,87.075 103.2,87.075 103.2,71.35 97.6,65.75
AGND on Bottom Layer "Top Layer-No Net" (solid, pour order 66): 57.9,65.75 53.575,65.75 49.5,69.825 49.5,83.45 46.15,86.8 27.15,86.8 25.935,88.015 25.935,98.885 27.025,99.975 47.743,99.975 57.9,90.614
AGND on Bottom Layer "Top Layer-No Net" (solid, pour order 56): 103.181,84.32 92.575,84.32 92.575,86.27 92.575,115.685 81.59,126.67 71.56,126.67 68.61,123.72 68.61,119.16 67.15,117.7 60.15,117.7 58.76,119.09 58.76,129.885 63.05,134.175 99.675,134.175 103.685,130.165 103.685,107.17 103.44,106.925
NetC2_1 on Bottom Layer "Top Layer-No Net" (solid, pour order 30): 136.46,143.751 153.985,143.751 153.985,97.91 127.9,71.825 107.312,71.825 107.312,83.475 123.99,83.475 137.085,96.57 145.11,104.595 145.11,118.37 144.91,118.57 144.91,132.15 136.46,132.15 136.46,137.67 136.46,143.095

## Other copper
Top Layer:
  rectangle net NetD2_2: 58.275,52.4 94.875,58.05

## Text inside footprints (layer, text, board x,y; h text height)
DR1: Top Overlay "+" at 136.321,164.503 h1.52 r270; Top Overlay "-" at 136.321,139.611 h1.52 r270; Top Overlay "~" at 135.559,154.597 h1.52 r270; Top Overlay "~" at 135.559,146.977 h1.52 r270
DR2: Top Overlay "+" at 136.321,120.603 h1.52 r270; Top Overlay "-" at 136.321,95.711 h1.52 r270; Top Overlay "~" at 135.559,110.697 h1.52 r270; Top Overlay "~" at 135.559,103.077 h1.52 r270